# EAGLE board EHM (EAGLE 9.2.2)
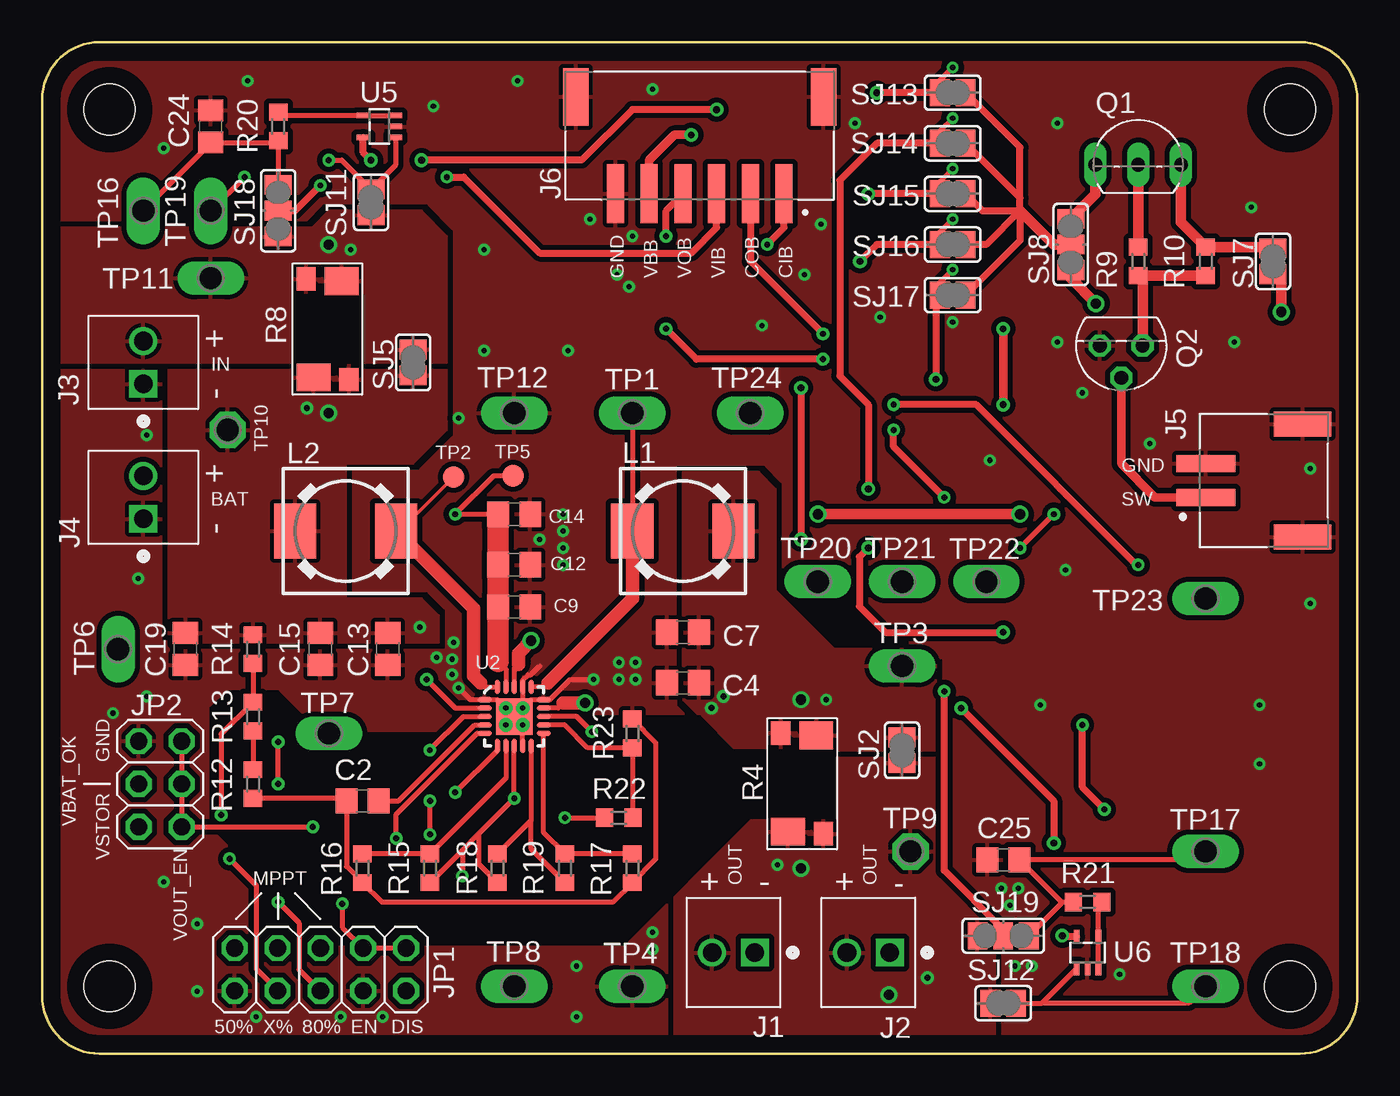
[diagram p0: board, top side]
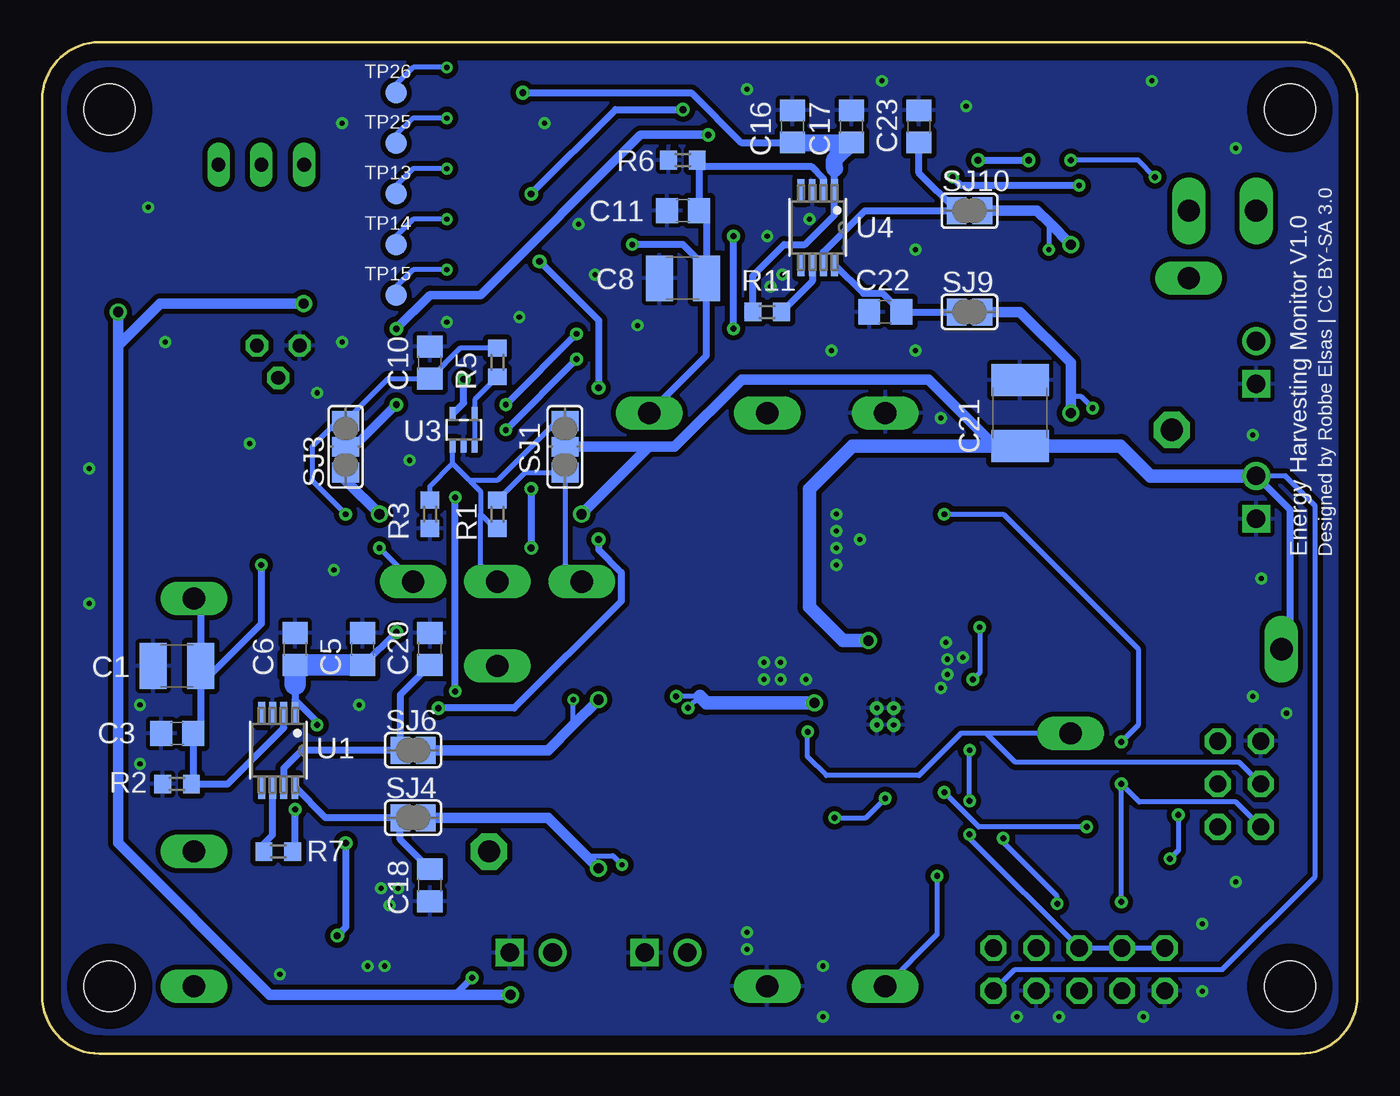
[diagram p1: board, bottom side, seen from below]

Size 78 x 60 mm. Coordinates in mm from the lower left corner, seen from the top.
Outline: 74.59,0 3.41,0 arc-90 0,3.41 0,56.59 arc-90 3.41,60 74.59,60 arc-90 78,56.59 78,3.41 arc-90 74.59,0
Copper layers (1*16): Top 0.035mm / dielectric 1.5mm / Bottom 0.035mm
Design rules "default *": minimum track width 6mil, minimum drill 0.3mm, track to track 6mil, track to pad 6mil, pad to pad 6mil, via to via 6mil, smd to smd 6mil, copper to edge 40mil, drill to drill 6mil, minimum pad ring 10mil, minimum via ring 8mil, stop-mask expansion 4mil, vias tented up to drill 0mil, thermal gap 10mil
Holes 3 mm at 4,56 74,56 74,4 4,4

## Footprints (pad centres in the part's own frame; a part is rotated, then mirrored left to right if it is on the bottom)
C1210 = smd 1.6 x 2.7: 1 -1.4,0; 2 1.4,0
C0805 = smd 1.3 x 1.5: 1 -0.95,0; 2 0.95,0
C1812 = smd 1.9 x 3.4: 1 -1.95,0; 2 1.95,0
CONN_282834-2 = drill 1.1 square: 1 -1.27,0 | drill 1.1: 2 1.27,0
JST_S2B-PH-SM4-TB(LF)(SN) = smd 1 x 3.5: 1 -1,0; 2 1,0 | smd 1.5 x 3.4: S1 -3.35,-5.75; S2 3.35,-5.75
JST_S6B-PH-SM4-TB(LF)(SN) = smd 1 x 3.5: 1 -5,0; 2 -3,0; 3 -1,0; 4 1,0; 5 3,0; 6 5,0 | smd 1.5 x 3.4: S1 -7.35,-5.75; S2 7.35,-5.75
2X05 = drill 1.016 octagon: 1 -5.08,-1.27; 2 -5.08,1.27; 3 -2.54,-1.27; 4 -2.54,1.27; 5 0,-1.27; 6 0,1.27; 7 2.54,-1.27; 8 2.54,1.27; 9 5.08,-1.27; 10 5.08,1.27
2X03 = drill 1.016 octagon: 1 -2.54,-1.27; 2 -2.54,1.27; 3 0,-1.27; 4 0,1.27; 5 2.54,-1.27; 6 2.54,1.27
DR73 = smd 2.5 x 3.25: 1 -3,0; 2 3,0
TO92-EBC = drill 0.813 long: B 0,-1.27; C -2.54,-1.27; E 2.54,-1.27
TO92 = drill 0.813 octagon: 1 1.27,0; 2 0,1.905; 3 -1.27,0
R0603 = smd 1 x 1.1: 1 -0.85,0; 2 0.85,0
Y14870RXX000B9R = smd 1.39 x 1.14: P$1 -3.014,-1.197; P$3 2.956,1.343 | smd 1.65 x 2.01: P$2 -2.884,0.908; P$4 2.826,-0.762
SJ_2 = smd 1.168 x 1.6: 1 -1.524,0; 2 0,0; 3 1.524,0
SJ = smd 1.168 x 1.6: 1 -0.762,0; 2 0.762,0
P1-13Y = drill 1.321 pad 1.905 long: TP 0,0
B1,27 = smd 1.27 x 1.27: TP 0,0
P1-13 = drill 1.321 pad 2.159 octagon: TP 0,0
21-0036K = smd 1.372 x 0.406: 1 -2.184,0.991; 2 -2.184,0.33; 3 -2.184,-0.33; 4 -2.184,-0.991; 5 2.184,-0.991; 6 2.184,-0.33; 7 2.184,0.33; 8 2.184,0.991
QFN50P350X350X100-21N = smd 0.85 x 0.3: 1 -1.75,1; 2 -1.75,0.5; 3 -1.75,0; 4 -1.75,-0.5; 5 -1.75,-1; 11 1.75,-1; 12 1.75,-0.5; 13 1.75,0; 14 1.75,0.5; 15 1.75,1 | smd 0.3 x 0.85: 6 -1,-1.75; 7 -0.5,-1.75; 8 0,-1.75; 9 0.5,-1.75; 10 1,-1.75; 16 1,1.75; 17 0.5,1.75; 18 0,1.75; 19 -0.5,1.75; 20 -1,1.75 | smd 2.15 x 2.15: 21 0,0 | drill 0.3 pad 0.45: 22 -0.5,0.5; 23 -0.5,-0.5; 24 0.5,-0.5; 25 0.5,0.5
SC70-5 = smd 0.35 x 0.8: 1 -0.65,-0.95; 2 0,-0.95; 3 0.65,-0.95; 4 0.65,0.95; 5 -0.65,0.95

## Placement (x,y rotation side)
C1  DNP  [C1210]  70,23 180 bottom
C2  0.01uF  [C0805]  19,15 180 top
C3  0.01uF  [C0805]  70,19 180 bottom
C4  22uF  [C0805]  38,22 180 top
C5  4.7uF  [C0805]  59,24 270 bottom
C6  0.1uF  [C0805]  63,24 270 bottom
C7  DNP  [C0805]  38,25 180 top
C8  DNP  [C1210]  40,46 180 bottom
C9  0.1uF  [C0805]  28,26.5 0 top
C10  [C0805]  55,41 90 bottom
C11  0.01uF  [C0805]  40,50 180 bottom
C12  4.7uF  [C0805]  28,29 0 top
C13  0.1uF  [C0805]  20.5,24 270 top
C14  DNP  [C0805]  28,32 0 top
C15  4.7uF  [C0805]  16.5,24 270 top
C16  4.7uF  [C0805]  33.5,55 270 bottom
C17  0.1uF  [C0805]  30,55 270 bottom
C18  DNP  [C0805]  55,10 270 bottom
C19  DNP  [C0805]  8.5,24 270 top
C20  0.1uF  [C0805]  55,24 90 bottom
C21  DNP  [C1812]  20,38 90 bottom
C22  DNP  [C0805]  28,44 180 bottom
C23  0.1uF  [C0805]  26,55 90 bottom
C24  [C0805]  10,55 90 top
C25  [C0805]  57,11.5 180 top
J1  282834-2  [CONN_282834-2]  41,6 180 top
J2  282834-2  [CONN_282834-2]  49,6 180 top
J3  282834-2  [CONN_282834-2]  6,41 90 top
J4  282834-2  [CONN_282834-2]  6,33 90 top
J5  S2B-PH-SM4-TB(LF)(SN)  [JST_S2B-PH-SM4-TB(LF)(SN)]  69,34 90 top
J6  S6B-PH-SM4-TB(LF)(SN)  [JST_S6B-PH-SM4-TB(LF)(SN)]  39,51 180 top
JP1  [2X05]  16.5,5 180 top
JP2  [2X03]  7,16 90 top
L1  DR73-100-R  [DR73]  38,31 180 top
L2  DR73-220-R  [DR73]  18,31 0 top
Q1  BC557B  [TO92-EBC]  65,54 0 top
Q2  BC547B  [TO92]  64,42 180 top
R1  DNP  [R0603]  51,32 270 bottom
R2  [R0603]  70,16 0 bottom
R3  DNP  [R0603]  55,32 90 bottom
R4  [Y14870RXX000B9R]  45,16 270 top
R5  DNP  [R0603]  51,41 90 bottom
R6  [R0603]  40,53 0 bottom
R7  DNP  [R0603]  64,12 180 bottom
R8  [Y14870RXX000B9R]  17,43 90 top
R9  DNP  [R0603]  65,47 90 top
R10  DNP  [R0603]  69,47 270 top
R11  DNP  [R0603]  35,44 0 bottom
R12  DNP  [R0603]  12.5,16 90 top
R13  DNP  [R0603]  12.5,20 90 top
R14  DNP  [R0603]  12.5,24 90 top
R15  [R0603]  23,11 270 top
R16  [R0603]  19,11 90 top
R17  [R0603]  35,11 90 top
R18  [R0603]  27,11 270 top
R19  [R0603]  31,11 270 top
R20  DNP  [R0603]  14,55 270 top
R21  DNP  [R0603]  62,9 180 top
R22  [R0603]  34.2,14 180 top
R23  [R0603]  35,19 270 top
SJ1  [SJ_2]  47,36 270 bottom
SJ2  [SJ]  51,18 270 top
SJ3  [SJ_2]  60,36 90 bottom
SJ4  [SJ]  56,14 0 bottom
SJ5  [SJ]  22,41 90 top
SJ6  [SJ]  56,18 0 bottom
SJ7  [SJ]  73,47 90 top
SJ8  [SJ_2]  61,48 90 top
SJ9  [SJ]  23,44 0 bottom
SJ10  [SJ]  23,50 0 bottom
SJ11  [SJ]  19.5,50.5 90 top
SJ12  [SJ]  57,3 0 top
SJ13  [SJ]  54,57 180 top
SJ14  [SJ]  54,54 180 top
SJ15  [SJ]  54,51 180 top
SJ16  [SJ]  54,48 180 top
SJ17  [SJ]  54,45 180 top
SJ18  [SJ_2]  14,50 90 top
SJ19  [SJ_2]  57,7 0 top
TP1  TPPAD1-13Y  [P1-13Y]  35,38 270 top
TP2  TPB1,27  [B1,27]  24.4,34.2 180 top
TP3  TPPAD1-13Y  [P1-13Y]  51,23 90 top
TP4  TPPAD1-13Y  [P1-13Y]  35,4 270 top
TP5  TPB1,27  [B1,27]  27.92,34.28 0 top
TP6  TPPAD1-13Y  [P1-13Y]  4.5,24 0 top
TP7  TPPAD1-13Y  [P1-13Y]  17,19 90 top
TP8  TPPAD1-13Y  [P1-13Y]  28,4 90 top
TP9  TPPAD1-13  [P1-13]  51.5,12 180 top
TP10  TPPAD1-13  [P1-13]  11,37 0 top
TP11  TPPAD1-13Y  [P1-13Y]  10,46 90 top
TP12  TPPAD1-13Y  [P1-13Y]  28,38 270 top
TP13  TPB1,27  [B1,27]  57,51 0 bottom
TP14  TPB1,27  [B1,27]  57,48 0 bottom
TP15  TPB1,27  [B1,27]  57,45 0 bottom
TP16  TPPAD1-13Y  [P1-13Y]  6,50 180 top
TP17  TPPAD1-13Y  [P1-13Y]  69,12 90 top
TP18  TPPAD1-13Y  [P1-13Y]  69,4 90 top
TP19  TPPAD1-13Y  [P1-13Y]  10,50 0 top
TP20  TPPAD1-13Y  [P1-13Y]  46,28 90 top
TP21  TPPAD1-13Y  [P1-13Y]  51,28 90 top
TP22  TPPAD1-13Y  [P1-13Y]  56,28 90 top
TP23  TPPAD1-13Y  [P1-13Y]  69,27 90 top
TP24  TPPAD1-13Y  [P1-13Y]  42,38 90 top
TP25  TPB1,27  [B1,27]  57,54 0 bottom
TP26  TPB1,27  [B1,27]  57,57 0 bottom
U1  MAX9934TAUA  [21-0036K]  64,18 270 bottom
U2  BQ25570RGRR  [QFN50P350X350X100-21N]  28,20 0 top
U3  TSU111ICT  [SC70-5]  53,37 0 bottom
U4  MAX9934TAUA  [21-0036K]  32,49 270 bottom
U5  TSU111ICT  [SC70-5]  20,55 90 top
U6  TSU111ICT  [SC70-5]  62,6 0 top

## Library data of the parts
C1-C25 = rcl; SPICEPREFIX: C
J1-J4 = 282834-2; AVAILABILITY: Unavailable; CENTERLINE_PITCH: 2.54 mm[.1 in]; COMMENT: 282834-2; DESCRIPTION: TERMI-BLOK PCB MOUNT, 90 2P.; EU_ROHS_COMPLIANCE: Compliant with Exemptions; MF: TE Connectivity; MP: 282834-2; NUMBER_OF_POSITIONS: 2; PACKAGE: None; PRICE: None; TE_PURCHASE_URL: https://www.te.com/usa-en/product-282834-2.html?te_bu=Cor&te_type=disp&te_campaign=seda_glo_cor-seda-global-disp-prtnr-fy19-seda-model-bom-cta_sma-317_1&elqCampaignId=32493
J5 = S2B-PH-SM4-TB_LF__SN_; AVAILABILITY: Unavailable; DESCRIPTION: PH Series 2 Position 2 mm Pitch Surface Mount Side Entry Shrouded Header; MF: JST Sales; MP: S2B-PH-SM4-TB_LF__SN_; PACKAGE: FakePackage u; PRICE: None
J6 = S6B-PH-SM4-TB_LF__SN_; AVAILABILITY: Unavailable; DESCRIPTION: PH Series 6 Position 2 mm Pitch Surface Mount Right Angle Shrouded Header; MF: JST Sales; MP: S6B-PH-SM4-TB_LF__SN_; PACKAGE: None; PRICE: None
JP1 JP2 = pinhead
L1 = DR73-100-R
L2 = DR73-220-R
Q1 = transistor-pnp
Q2 = transistor-npn
R1-R3 R5-R7 R9-R23 = rcl; SPICEPREFIX: R
R4 R8 = Y14870RXX000B9R
SJ1-SJ19 = jumper
TP1-TP26 = testpad
U1 U4 = MAX9934TAUA; DESCRIPTION: Linear IC - Op-amp Maxim Integrated MAX9934TAUA+ Current sensor uMAX 8; DIGI-KEY_PART_NUMBER: MAX9934TAUA+-ND; DIGI-KEY_PURCHASE_URL: https://www.digikey.be/product-detail/en/maxim-integrated/MAX9934TAUA-/MAX9934TAUA--ND/2239130?utm_source=snapeda&utm_medium=aggregator&utm_campaign=symbol; MF: Maxim Integrated; MP: MAX9934TAUA+; PACKAGE: MSOP-8 Maxim Integrated
U2 = BQ25570RGRR; AVAILABILITY: Unavailable; DESCRIPTION: Ultra Low Power Harvester Power Management IC with Boost Charger, and Nanopower Buck Converter 20-VQFN; MF: Texas Instruments; MP: BQ25570RGRR; PACKAGE: VQFN-20 Texas Instruments; PRICE: None
U3 U5 U6 = TSU111ICT

## Nets
CMES1: C8.1 C11.1 J6.1 R6.2 TP24.TP U4.2
CMES2: C1.1 C3.1 J6.2 R2.2 TP23.TP U1.2
GND: C1.2 C2.2 C3.2 C4.2 C5.1 C6.1 C7.2 C8.2 C9.2 C10.2 C11.2 C12.2 C13.2 C14.2 C15.2 C16.1 C17.1 C18.2 C19.2 C20.2 C21.2 C22.2 C23.2 C24.2 C25.2 J1.1 J2.1 J3.1 J4.1 J5.2 J5.S1 J5.S2 J6.6 J6.S1 J6.S2 JP1.4 JP1.10 JP2.6 Q2.1 R2.1 R3.1 R6.1 R12.1 R16.1 R17.1 R23.1 TP4.TP TP12.TP U1.3 U2.1 U2.9 U2.15 U2.17 U2.21 U2.22 U2.23 U2.24 U2.25 U3.2 U4.3 U5.2 U6.2
LBOOST: L2.2 TP2.TP U2.20
LBUCK: L1.2 TP1.TP U2.16
N$1: C22.1 SJ9.1 U4.8
N$2: R12.2 R13.1
N$3: JP1.8 R13.2 R14.1
N$4: R11.2 U4.6
N$5: R20.1 U5.3 U5.4
N$6: C23.1 SJ10.1 U4.7
N$7: R7.2 U1.6
N$8: SJ11.2 TP19.TP U5.1
N$9: R21.1 U6.3 U6.4
N$10: C20.1 SJ6.1 U1.7
N$11: C18.1 SJ4.1 U1.8
N$12: C24.1 R20.2 SJ18.3 TP16.TP
N$13: C25.1 R21.2 SJ19.3 TP17.TP
N$14: SJ12.2 TP18.TP U6.1
N$15: R5.1 U3.3 U3.4
N$16: C10.1 R5.2 SJ3.3 TP22.TP
N$17: R1.2 R3.2 SJ1.1 TP21.TP U3.1
N$18: R1.1 SJ1.3 TP20.TP
N$19: Q2.3 R9.1 R10.2
N$20: Q1.B R9.2
N$21: Q1.C SJ8.3
N$23: Q1.E R10.1 SJ7.2
NEN: JP1.1 JP1.3 U2.5
OK_HYST: R18.1 R19.2 U2.10
OK_PROG: R17.2 R19.1 U2.11
RSN2: J1.2 J2.2 R4.P$3 R4.P$4 SJ2.2 SJ4.2 SJ7.1 SJ8.1 SJ12.1 SJ19.1 TP9.TP
RSN2_BUF: J6.4 SJ19.2
RSP1: J3.2 R8.P$3 R8.P$4 SJ5.2 SJ10.2 SJ11.1 SJ18.1 TP11.TP
RSP1_BUF: J6.3 SJ18.2
SW: J5.1 Q2.2
VBAT: C21.1 J4.2 JP1.2 SJ1.2 SJ3.1 TP6.TP U2.18
VBAT_BUF: J6.5 SJ3.2
VBAT_OK: JP2.4 TP7.TP U2.13
VBAT_OV: R15.1 R16.2 U2.7
VCC_SW: SJ8.2 SJ13.1 SJ14.1 SJ15.1 SJ16.1 SJ17.1
VCC_SW1: C16.2 C17.2 R11.1 SJ13.2 TP26.TP U4.1
VCC_SW2: C5.2 C6.2 R7.1 SJ14.2 TP25.TP U1.1
VCC_SW3: SJ15.2 TP13.TP U5.5
VCC_SW4: SJ16.2 TP14.TP U6.5
VCC_SW5: SJ17.2 TP15.TP U3.5
VIN_DC: C13.1 C15.1 C19.1 L2.1 R8.P$1 R8.P$2 R14.2 SJ5.1 SJ9.2 TP10.TP U2.2
VOC_SAMP: JP1.5 JP1.7 JP1.9 U2.3
VOUT: C4.1 C7.1 L1.1 R4.P$1 R4.P$2 SJ2.1 SJ6.2 TP3.TP U2.14
VOUT_EN: JP2.1 JP2.3 JP2.5 U2.6
VOUT_SET: R22.1 R23.2 U2.12
VRDIV: R15.2 R18.2 R22.2 TP8.TP U2.8
VREF_SAMP: C2.1 U2.4
VSTOR: C9.1 C12.1 C14.1 JP1.6 JP2.2 TP5.TP U2.19

## Tracks (layer width: path | path; a pad name or v marks a point on that pad's centre or on a via)
CMES1  (via drill 0.35)
  Top 0.406: v43,48 44,49 J6.1
  Bottom 0.406: R6.2 39.05,52.9 | TP24.TP 38.6,41.4 C8.1 | U4.2 31.67,51.92 32.35,52.6 38.75,52.6 R6.2 | C8.1 38.6,46.6 40,48 v43,48 | C8.1 38.6,49.55 C11.1 39.05,52.9 | R6.2 39.05,52.9
CMES2  (via drill 0.35)
  Top 0.406: J6.2 42,47 v46.3,42.7 | v50.5,38.5 55.4,38.5 64.9,29 v65,29
  Bottom 0.406: U1.2 63.67,19.33 67,16 R2.2 69.05,16.1 C3.1 68.6,19.45 68.6,22 | 68.6,22 C1.1 68.6,26.6 TP23.TP | v50.5,38.5 v46.3,42.7 | v65,29 65,25.5 68.5,22 68.6,22
GND  (via drill 0.3)
  Top 0.305: R23.1 36.4,18.45 36.4,11.55 R17.1 33.85,9 20.15,9 R16.1 18.05,11.1 C2.2 17.9,15.15 12.8,15.15 | R12.1 12.65,15 | v24.7,21.7 25.4,21 U2.1 27,21 U2.21 | v32.7,22.2 31.29,22.2 30.09,21 U2.15 29,21 U2.21 | U2.9 U2.24 U2.21 | U2.21 U2.25 U2.17 28.5,22.17 28.81,22.48 28.98,22.48 29.5,23
  Top 0.406: 12.8,15.15 12.65,15
  other vias: 32.5,49.5 24.4,24.4 24.3,23.4 24.3,22.5 23.4,23.5 56.9,9.8 57.9,9.8 57.4,8.8 34.2,22.2 35.2,23.2 35.2,22.2 34.2,23.2 31.2,41.7 26.2,47.7 42.7,43.2 28.2,57.7 60.2,42.2 70.7,42.2 75.2,26.7 60.7,28.7 59.2,20.7 31.7,5.2 31.7,2.2 6.2,21.2 5.7,28.2 30.9,32 30.9,31 30.9,30 30.9,29 7.2,53.7 60.2,55.2 56.2,35.2 49.7,43.7 6.2,36.7 65.7,36.2 36.2,57.2 34.1,46.2 34.8,45.5 24.7,37.7 26.2,41.7 23.2,56.2 61.7,39.2 75.2,34.7 29.5,30.5 12.2,57.7 48.2,55.2 46.2,49.2 45.2,46.2 35,48.5 54,43.4 7.2,10.2 9.2,7.7 9.2,3.7 17.7,2.2 20.2,2.2 12.7,2.2 4.2,20.2 72.2,20.7 72.2,17.2 36.2,7.2 36.2,6.2 57.7,5.2 58.7,5.2 63.9,4.7 71.7,50.2
  pour Top (isolate 0.305, rank 6): 0,0 0,60 78,60 78,0.5 78,0
  pour Bottom (isolate 0.305, rank 6): 0,0 0,60 78,60 78,0
LBOOST
  Top 0.2: TP2.TP 21.2,31 L2.2
  Top 0.305: 26,22 26.25,21.75 U2.20
  Top 0.813: L2.2 25.6,26.4 25.6,22.4 26,22
LBUCK
  Top 0.305: TP1.TP L1.2 | 30,22 29.75,21.75 U2.16
  Top 0.813: L1.2 35,27 30,22
N$1
  Bottom 0.406: SJ9.1 C22.1 27.94,44.89 27.94,44.9 28.15,45.11 29.3,45.11 U4.8
N$2
  Top 0.305: R13.1 R12.2
N$3  (via drill 0.35)
  Top 0.305: R14.1 R13.2 10.61,18.96 v10.61,14.17 | JP1.8 13.96,3.76 12.69,5.03 12.69,9.99 v11.11,11.57
  Bottom 0.305: v10.61,14.17 10.61,12.07 v11.11,11.57
N$4
  Bottom 0.406: U4.6 32.33,45.82 R11.2
N$5
  Top 0.305: R20.1 14.2,55.65 U5.4 U5.3
N$6
  Bottom 0.406: U4.7 31.67,47.55 29.22,50 SJ10.1 26,52.24 C23.1
N$7
  Bottom 0.406: R7.2 64.85,12.45 64.33,12.97 U1.6
N$8  (via drill 0.35)
  Top 0.305: v12,52 TP19.TP | v17,53 17.76,53 SJ11.2 20.95,52.71 U5.1
  Bottom 0.305: v12,52 13,53 v17,53
N$9
  Top 0.305: U6.3 U6.4 62.65,8.8 R21.1
N$10
  Bottom 0.406: C20.1 56.76,21.29 SJ6.1 62.6,18 63.67,16.93 U1.7
N$11
  Bottom 0.406: C18.1 56.76,12.71 SJ4.1 61.19,14 U1.8
N$12
  Top 0.305: TP16.TP 10,54 C24.1 13.9,54.05 R20.2 SJ18.3
N$13
  Top 0.305: TP17.TP 68.5,11.5 C25.1 60.45,9 | 60.45,9 R21.2 | SJ19.3 60.45,8.93 60.45,9
N$14
  Top 0.305: SJ12.2 59.3,3 | 59.3,3 U6.1 | TP18.TP 68,3 59.3,3
N$15
  Bottom 0.305: U3.3 U3.4 52.35,38.8 R5.1
N$16  (via drill 0.35)
  Top 0.305: v60,32 v58,30
  Bottom 0.305: TP22.TP v58,30 | R5.2 53.2,41.85 C10.1 57.47,40.05 SJ3.3 60.48,37.52 62,36 62,34 v60,32
N$17
  Bottom 0.305: 53.65,35 U3.1 | SJ1.1 47.48,37.52 51,34 52.65,34 | 52.65,34 53.65,35 | R3.2 55,33.65 53.65,35 | 52.65,34 52,33.35 52,32 | 52,32 51.15,31.15 R1.2 | TP21.TP 52,29 52,32
N$18
  Bottom 0.305: R1.1 49.37,34.48 SJ1.3 47,29 TP20.TP
N$19
  Top 0.61: Q2.3 65.27,45.88 R9.1 R10.2
N$20
  Top 0.61: R9.2 Q1.B
N$21
  Top 0.61: Q1.C 62.46,50.98 SJ8.3
N$22
  cutout Top (isolate 0.305): 34.5,6.5 42,14 47,14 47,18 41,18 39,20 30.5,20 30.5,19 16.5,19 14,21.5 11,21.5 10,20.5 10,13.5 17,6.5
N$23
  Top 0.61: Q1.E 67.54,49.31 R10.1 72.91,47.85 SJ7.2
N$24
  cutout Top (isolate 0.305): 14.9,41 14.9,45 19,45 19,41
NEN  (via drill 0.35)
  Top 0.305: v17.8,8.9 17.8,7.51 JP1.3 JP1.1 | v21,12.77 21,14.2 25.8,19 U2.5
  Bottom 0.305: v17.8,8.9 17.8,9.33 21,12.53 v21,12.77
OK_HYST
  Top 0.305: R18.1 29,13.85 | R19.2 29,12.15 29,13.85 | U2.10 29,13.85
OK_PROG
  Top 0.305: R17.2 R19.1 29.75,13.1 U2.11
RSN2  (via drill 0.3, 0.35, 0.6)
  Top 0.61: v62.5,44.5 61,46 SJ8.1 | v73.5,44 73.5,45.74 SJ7.1
  Bottom 0.305: 45.75,11.75 44.15,11.75 v43.6,11.2
  Bottom 0.406: 53.5,3.5 v52.5,4.5
  Bottom 0.61: SJ4.2 48,14 45.75,11.75 v45,11 | v50.23,3.5 53.5,3.5 64.5,3.5 73.5,12.5 73.5,42 | 73.5,42 71,44.5 v62.5,44.5 | 73.5,42 v73.5,44
  pour Top (isolate 0.305, rank 3): 37.5,0 37.5,9.5 42.5,14.5 47,14.5 47,18 53,18 53,11 56.5,7.5 56.5,0
RSN2_BUF  (via drill 0.35)
  Top 0.406: v53.5,33 50.5,36 v50.5,37 | v46.3,41.2 38.8,41.2 v37,43 | v37,48.5 37,50 J6.4 | v53.5,21.5 53.5,10.86 57,7.36 SJ19.2
  Bottom 0.406: v53.5,21.5 v53.5,33 | v50.5,37 v46.3,41.2 | v37,43 v37,48.5
RSP1  (via drill 0.3, 0.6)
  Bottom 0.254: 18.25,49.25 18.3,49.2
  Bottom 0.305: 18.3,49.2 v18.3,47.7
  Bottom 0.61: SJ10.2 19,50 18.25,49.25 v17,48
  pour Top (isolate 0.305): 0,41 24,41 24,48.5 22.5,50 17,50 16,49 0,49
RSP1_BUF  (via drill 0.35)
  Top 0.406: SJ18.2 15,50 v16.5,51.5 | v24,52 25,52 29.5,47.5 38.5,47.5 40,49 J6.3
  Bottom 0.406: v16.5,51.5 23.5,51.5 v24,52
SW
  Top 0.508: J5.1 66,33 64,35 Q2.2
VBAT  (via drill 0.6)
  Top 0.305: 28.24,23.1 28,22.86 U2.18
  Top 0.61: v46,32 v58,32
  Top 0.813: v29,24.5 28.24,23.74 28.24,23.1
  Bottom 0.305: JP1.2 20.31,5 8,5 2.5,10.5 2.5,32.5 4.27,34.27 J4.2
  Bottom 0.406: J4.2 4,32.27 4,24.5 TP6.TP
  Bottom 0.61: C21.1 21.5,36.05 25.45,40 36.5,40 40.5,36 42,36 | 42,36 SJ1.2 | v46,32 42,36 | v58,32 60,34 SJ3.1
  Bottom 0.813: J4.2 12.27,34.27 14.05,36.05 C21.1 29.95,36.05 32.5,33.5 32.5,26.5 30.5,24.5 v29,24.5
VBAT_BUF  (via drill 0.4)
  Top 0.508: v57,38.5 v57,43 | v38.5,54.5 37.5,54.5 36,53 J6.5
  Bottom 0.508: SJ3.2 59.5,36 v57,38.5 | v57,43 55,45 52,45 42.5,54.5 v38.5,54.5
VBAT_OK  (via drill 0.35)
  Top 0.305: v32.6,19.1 31.7,20 U2.13
  Bottom 0.305: JP2.4 7.01,17.28 20.28,17.28 22,19 | TP7.TP 22,19 | 22,19 23.5,19 26,16.5 31.5,16.5 32.6,17.6 v32.6,19.1
VBAT_OV
  Top 0.305: R16.2 R15.1 27.5,16.35 U2.7
VCC_SW
  Top 0.406: 58,50 58,50.76 | 58,50.76 58,53.76 SJ13.1 | SJ14.1 58,50.76 | SJ15.1 55.76,50 58,50 | 58,50 56,48 SJ16.1 | 58,50 58,48.24 SJ17.1
  Top 0.61: SJ8.2 60,48 58,50
VCC_SW1  (via drill 0.3, 0.4)
  Top 0.305: SJ13.2 53.24,57.74 v54,58.5
  Top 0.406: SJ13.2 v49.5,57
  Bottom 0.305: v54,58.5 56,58.5 57,57.5 TP26.TP
  Bottom 0.406: v49.5,57 39.5,57 36.55,54.05 C16.2 | 30.05,54 C17.2 | 31,52.5 31.01,52.49 U4.1 31.01,49.75 32.76,48 34,48 35.85,46.15 R11.1
  Bottom 1.016: C16.2 30.1,54.05 30.05,54 | C17.2 31,53.05 31,52.5
VCC_SW2  (via drill 0.3, 0.35, 0.4)
  Top 0.305: SJ14.2 53.24,54.74 v54,55.5
  Top 0.406: v63,14.5 61.7,15.8 v61.7,19.5 | v57,25 50.01,25 48.46,26.54 48.46,29.46 v49,30 | SJ14.2 49.5,54 47.3,51.8 47.3,40.2 49,38.5 v49,33.5
  Bottom 0.305: v54,55.5 56,55.5 57,54.5 TP25.TP
  Bottom 0.406: 63,21.9 63.01,21.89 63.01,21 | 63.01,21 U1.1 | R7.1 63,12.15 v63,14.5 | v61.7,19.5 61.7,19.69 63.01,21 | v49,33.5 v49,30 | v57,25 58.95,23.05 C5.2
  Bottom 1.27: C5.2 C6.2 63,21.9
VCC_SW3  (via drill 0.3, 0.4)
  Top 0.254: 53.24,51.74 v54,52.5
  Top 0.305: SJ15.2 53.24,51.74
  Top 0.406: SJ15.2 v49,51 | v40,56 35,56 32,53 v22.5,53 | v19.5,53 19.05,53.45 U5.5
  Bottom 0.305: v54,52.5 56,52.5 57,51.5 TP13.TP
  Bottom 0.406: v49,51 44,56 v40,56 | v22.5,53 v19.5,53
VCC_SW4  (via drill 0.3, 0.4)
  Top 0.305: SJ16.2 53.24,48.74 v54,49.5
  Top 0.406: SJ16.2 49.5,48 v48.5,47 | v45,39.5 v45,30.5 | v54.5,20.5 60,15 v60,12.5 | v60.5,7 60.55,6.95 U6.5
  Bottom 0.305: v54,49.5 56,49.5 57,48.5 TP14.TP
  Bottom 0.406: v48.5,47 45,43.5 v45,39.5 | v45,30.5 45,29.89 43.66,28.56 43.66,26.84 50,20.5 v54.5,20.5 | v60,12.5 60,7.5 v60.5,7
VCC_SW5  (via drill 0.3, 0.4)
  Top 0.305: SJ17.2 53.24,45.74 v54,46.5
  Top 0.406: SJ17.2 53,44.76 v53,40
  Bottom 0.305: v54,46.5 56,46.5 57,45.5 TP15.TP
  Bottom 0.406: U3.5 53,38.6 v53,40
VIN_DC  (via drill 0.35, 0.6)
  Top 0.305: v22.8,22.2 24.5,20.5 U2.2
  Bottom 0.305: v22.4,25.3 22.4,22.6 v22.8,22.2 | 17,39 16.4,39 v15.7,38.3
  Bottom 0.61: v17,38 17,39 17,41 20,44 SJ9.2
  pour Top (isolate 0.305, rank 2): 7.5,24.4 7.5,41 24,41 24,37 22,35 18,35 18,27 22.5,27 23.5,26 23.5,24.4
VOC_SAMP  (via drill 0.35)
  Top 0.305: v22.99,18.01 24.98,20 U2.3 | v23,13 v23,15
  Bottom 0.305: v22.99,18.01 v23,18 v23,15 | JP1.9 JP1.7 JP1.5 23,12.77 v23,13
VOUT  (via drill 0.3, 0.35, 0.6)
  Top 0.305: 30.9,20.8 30.6,20.5 U2.14
  Top 0.813: v32.2,20.8 30.9,20.8
  Bottom 0.305: v39.7,20.5 39,21.2 v40.4,21.2 | 46.5,19.5 v46.5,21
  Bottom 0.61: SJ6.2 48,18 46.5,19.5 v45,21
  Bottom 0.813: v32.2,20.8 38.6,20.8 39,21.2
  pour Top (isolate 0.305, rank 2): 38,34.5 42.5,34.5 43.5,33.5 43.5,27.5 47,24 53,24 53,18 41,18 38,21 38,26
VOUT_EN  (via drill 0.35)
  Top 0.305: v16.05,13.45 v16.04,13.46 JP2.1 JP2.3 JP2.5 | v24.5,15.5 27,18 U2.6
  Bottom 0.305: v16.05,13.45 22.45,13.45 v24.5,15.5
VOUT_SET
  Top 0.305: R22.1 35.05,18.1 R23.2 32.35,18.15 31,19.5 U2.12
VRDIV  (via drill 0.35)
  Top 0.305: R15.2 24.93,12.07 | 24.93,12.07 25.93,13.07 | R18.2 25.93,11.22 25.93,13.07 | 25.93,13.07 v28,15.15 U2.8 | v31,14 R22.2 | v24.92,10.54 v24.93,10.54 24.93,12.07
  Bottom 0.305: v24.92,10.54 24.92,7.08 TP8.TP | v28,15.15 29.15,14 v31,14
VREF_SAMP
  Top 0.305: C2.1 21.15,15 25.65,19.5 U2.4
VSTOR  (via drill 0.35)
  Top 0.305: v14,9 15.24,7.76 15.24,4.99 JP1.6 | v14,16 v14,18.5 | C14.1 v24.5,32 26.78,34.28 TP5.TP | 27.05,23.26 27.5,22.81 U2.19
  Top 1.27: 27.05,23.26 C9.1 C12.1 C14.1
  Bottom 0.305: v14,18.5 13,19.5 13,24 21,32 v24.5,32 | v14,9 v14,16 12.93,14.93 7.2,14.93 JP2.2

## Text on the board
tPlace: GND | VBB | VOB | VIB | COB | CIB | + | - | IN | + | GND | - | BAT | SW | GND | VBAT_OK | VSTOR | MPPT | + | OUT | - | + | OUT | - | VOUT_EN | 50% | X% | 80% | EN | DIS
bPlace: Designed by Robbe Elsas | CC BY-SA 3.0 | Energy Harvesting Monitor V1.0